# Altium PCB PCB2.PcbDoc
Units mm, origin at the board's own origin, x right, y up, seen from the top; angles counter-clockwise.
Board outline 50 x 20 mm, 2 copper layers (Top Layer, Bottom Layer); 18 components, 0 nets, 30 pads, 0 vias.
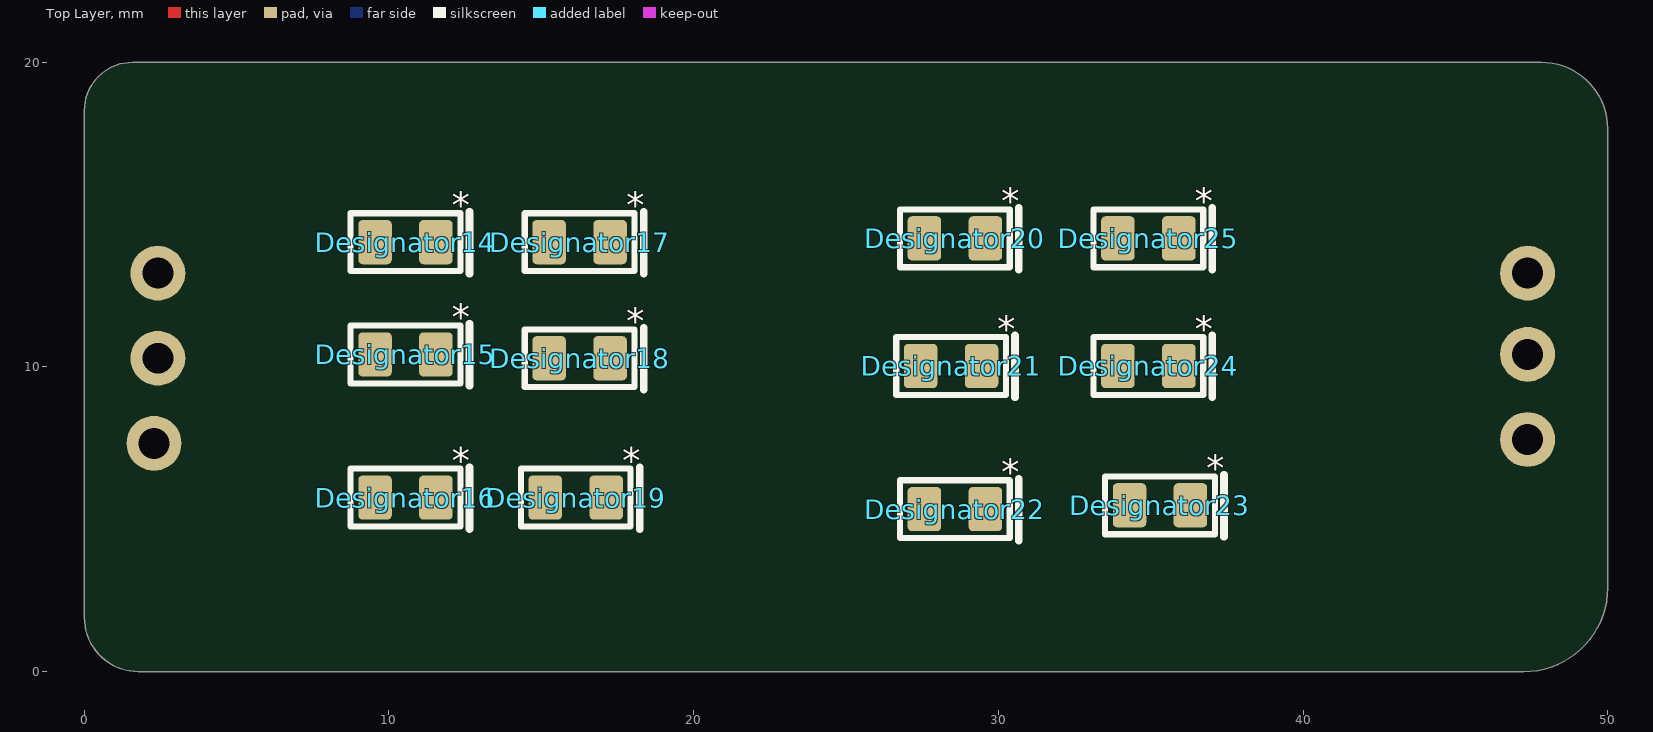
[diagram p0: Top Layer view]
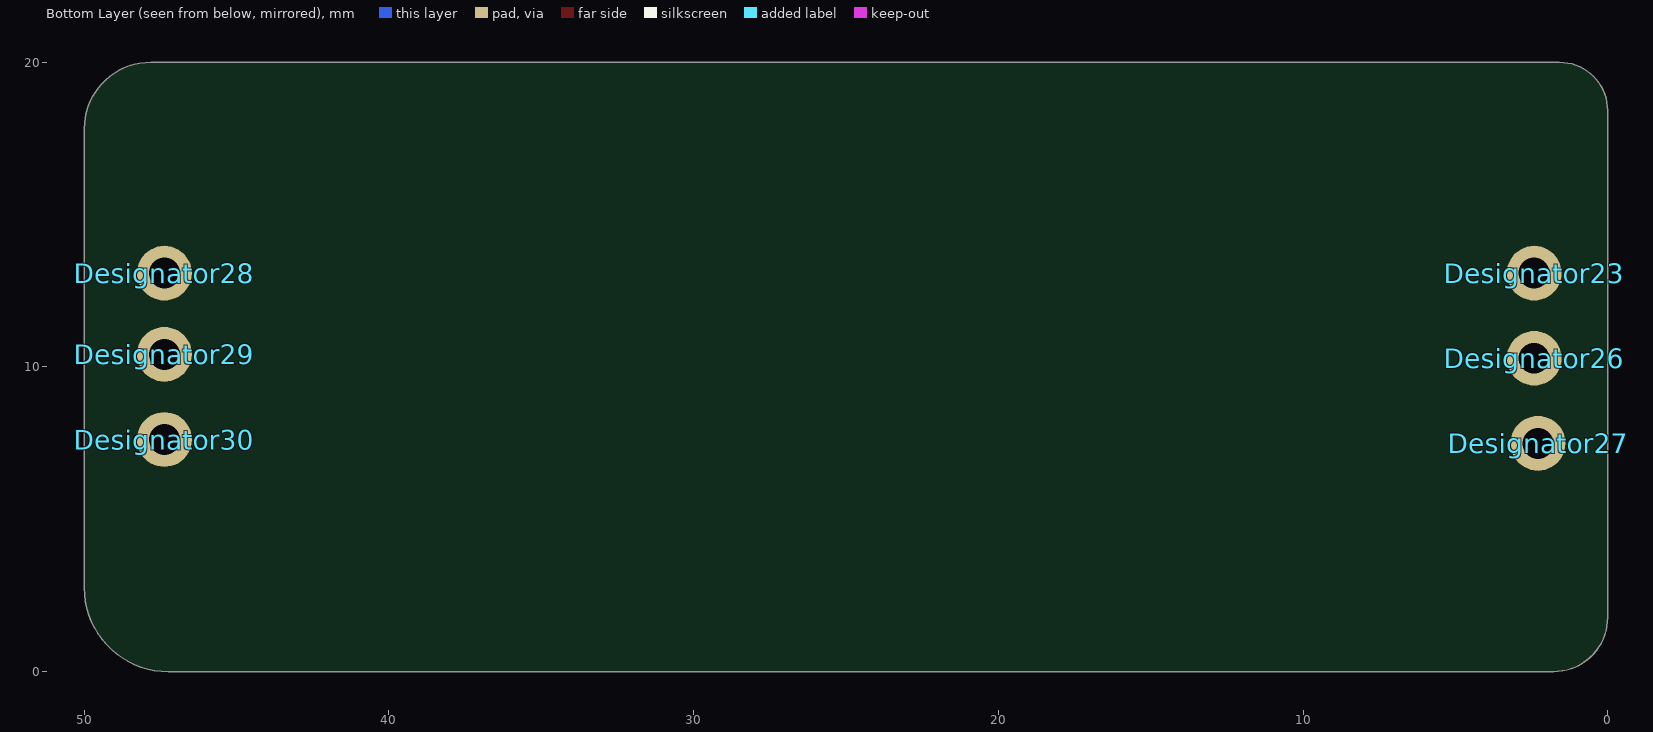
[diagram p1: Bottom Layer view, seen from below]

## Layer stack, top to bottom
Top Solder: solder mask 0.0102, Solder Resist, Dk 3.5
Top Layer: signal copper 0.0356
Dielectric 1: dielectric 0.32, FR-4, Dk 4.8
Bottom Layer: signal copper 0.0356
Bottom Solder: solder mask 0.0102, Solder Resist, Dk 3.5

## Board outline
0,1.778 0,18.415 cw(c1.585,18.415) 1.585,20 47.818,20 cw(c47.818,17.818) 50,17.818 50,2.756 cw(c47.244,2.756) 47.244,0 1.778,0 cw(c1.778,1.778)

## Design rules (kind name [scope] priority, off if disabled: settings)
Clearance [All] p1: gap=0.254 ignorepadtopadclearanceinfootprint=FALSE
PolygonConnect [All] p1: connectstyle=Relief reliefconductorwidth=0.254 reliefentries=4 polygonreliefangle="90 Angle" airgapwidth=0.254
RoutingVias [All] p1: holewidth=0.711 width=1.27 viastyle="Through Hole" minholewidth=0.711 minwidth=1.27 maxholewidth=0.711 maxwidth=1.27
SolderMaskExpansion [All] p1: expansion=0.102 istentingtop=FALSE
Width [All] p1: maxlimit=0.254 minlimit=0.254 preferedwidth=0.254
30 further rules are at their usual default settings.

## Components (designator, comment, footprint, x,y, rotation, side; value= is the part's Value field where it differs from the comment)
Designator14 "Comment" 0805_LED 10.541,14.097 r0 top
Designator15 "Comment" 0805_LED 10.541,10.414 r0 top
Designator16 "Comment" 0805_LED 10.541,5.715 r0 top
Designator17 "Comment" 0805_LED 16.256,14.097 r0 top
Designator18 "Comment" 0805_LED 16.256,10.287 r0 top
Designator19 "Comment" 0805_LED 16.129,5.715 r0 top
Designator20 "Comment" 0805_LED 28.575,14.224 r0 top
Designator21 "Comment" 0805_LED 28.448,10.033 r0 top
Designator22 "Comment" 0805_LED 28.575,5.334 r0 top
Designator23 "Comment" GenericPinHeader(.1in) 2.413,13.081 r180 bottom
Designator23 "Comment" 0805_LED 35.306,5.461 r0 top
Designator24 "Comment" 0805_LED 34.925,10.033 r0 top
Designator25 "Comment" 0805_LED 34.925,14.224 r0 top
Designator26 "Comment" GenericPinHeader(.1in) 2.413,10.287 r180 bottom
Designator27 "Comment" GenericPinHeader(.1in) 2.286,7.493 r180 bottom
Designator28 "Comment" GenericPinHeader(.1in) 47.371,13.081 r180 bottom
Designator29 "Comment" GenericPinHeader(.1in) 47.371,10.414 r180 bottom
Designator30 "Comment" GenericPinHeader(.1in) 47.371,7.62 r180 bottom

## Footprints (in the part's own frame and the unit in brackets; to place one, negate y for a bottom-side part, rotate by r counter-clockwise, add the part's x,y. Pads: shape width x height; smd on the part's side, far side on the other; paste and mask are expansions set on the pad)
0805_LED [mm]
  rrect25% 1.1x1.45 smd: 1(-1,0) 2(1,0)
  silkscreen extent -1.8,-1.03 2.1,1, body extent -1.05,-0.67 1.05,0.68, height 0.9
GenericPinHeader(.1in) [mm] "Generic .1in (2.54mm) pin header"
  round 1.8 hole 1.016: 1(0,0)
  body extent -1.27,-1.27 1.27,1.27, height 9.5

## Nets (pads, with @x,y where several pads share a name; then routed paths per layer and width w, separated by ;. In a path a pad name is that pad's centre, name@x,y a point inside that pad or via, vN(x,y) a via of type N, cw(c..) or ccw(c..) an arc to the next point about the centre after c; other vN are vias at no path point)
pads on no net: Designator14.1 Designator14.2 Designator15.1 Designator15.2 Designator16.1 Designator16.2 Designator17.1 Designator17.2 Designator18.1 Designator18.2 Designator19.1 Designator19.2 Designator20.1 Designator20.2 Designator21.1 Designator21.2 Designator22.1 Designator22.2 Designator23.1 Designator23.2 Designator24.1 Designator24.2 Designator25.1 Designator25.2 Designator26.1 Designator27.1 Designator28.1 Designator29.1 Designator30.1

## Text inside footprints (layer, text, board x,y; h text height)
Designator14: Top Overlay "*" at 12.065,14.605 h1.52
Designator15: Top Overlay "*" at 12.065,10.922 h1.52
Designator16: Top Overlay "*" at 12.065,6.223 h1.52
Designator17: Top Overlay "*" at 17.78,14.605 h1.52
Designator18: Top Overlay "*" at 17.78,10.795 h1.52
Designator19: Top Overlay "*" at 17.653,6.223 h1.52
Designator20: Top Overlay "*" at 30.099,14.732 h1.52
Designator21: Top Overlay "*" at 29.972,10.541 h1.52
Designator22: Top Overlay "*" at 30.099,5.842 h1.52
Designator23: Top Overlay "*" at 36.83,5.969 h1.52
Designator24: Top Overlay "*" at 36.449,10.541 h1.52
Designator25: Top Overlay "*" at 36.449,14.732 h1.52